# Altium PCB PCB1.PcbDoc
Units mil, origin at the board's own origin, x right, y up, seen from the top; angles counter-clockwise.
Board outline 11805 x 4015 mil, 2 copper layers (Top Layer, Bottom Layer); 46 components, 45 nets, 162 pads, 5 vias.
Unrouted connection lines stored in the file: 1.
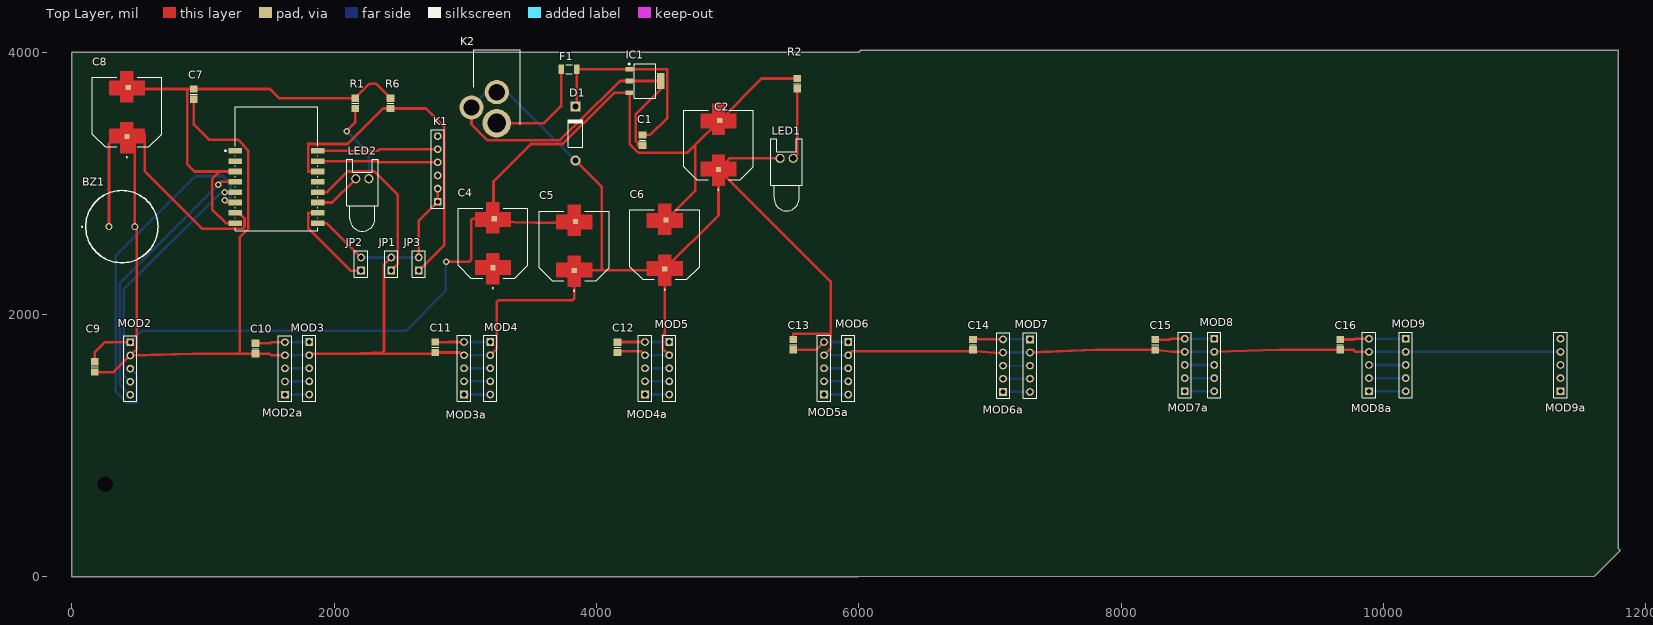
[diagram p0: Top Layer view]
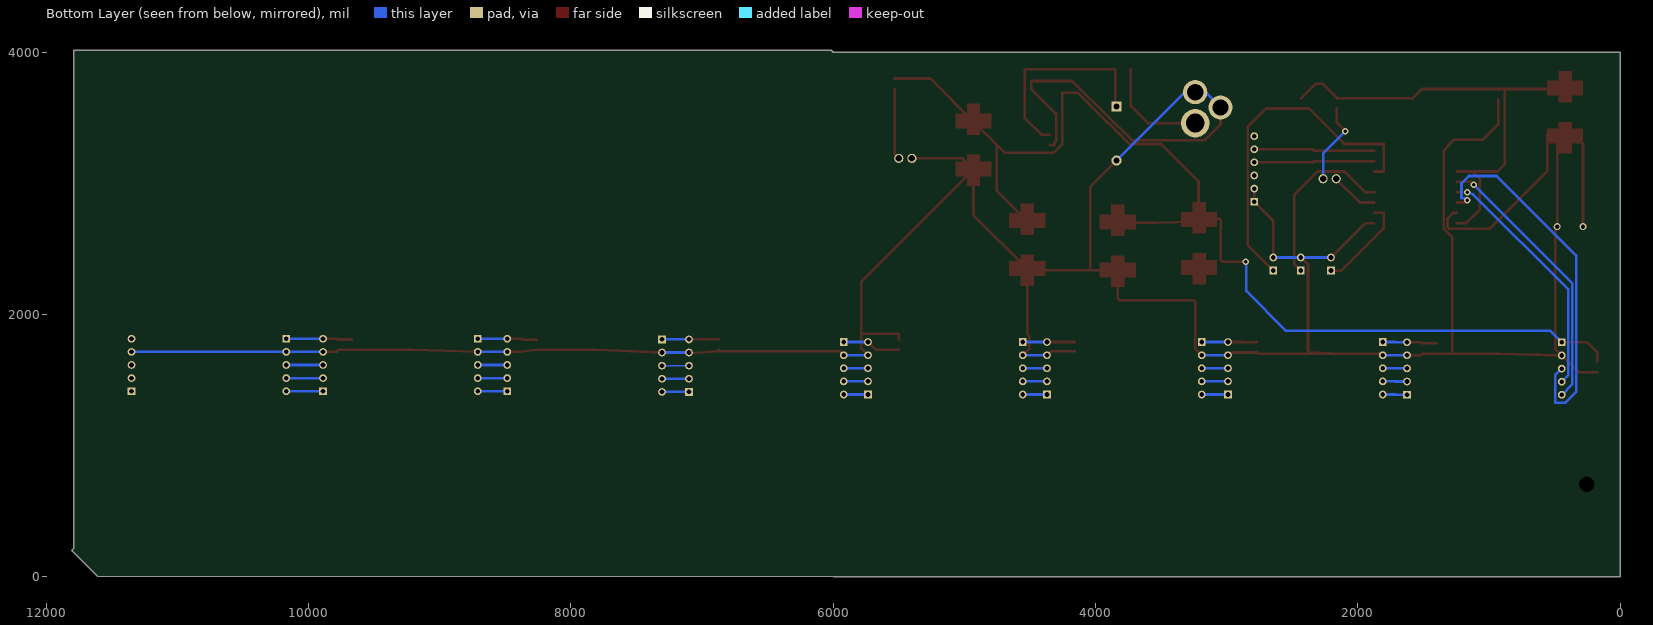
[diagram p1: Bottom Layer view, seen from below]

## Layer stack, top to bottom
Top Solder: solder mask 0.4, Solder Resist, Dk 3.5
Top Layer: signal copper 1.4
Dielectric 1: dielectric 12.6, FR-4, Dk 4.8
Bottom Layer: signal copper 1.4
Bottom Solder: solder mask 0.4, Solder Resist, Dk 3.5

## Board outline
6000,4000 6015,4015 11790,4015 11790,215 11805,200 11610,5 5995,0 0,0 0,4000

## Design rules (kind name [scope] priority, off if disabled: settings)
Clearance [All] p1: gap=10 ignorepadtopadclearanceinfootprint=FALSE except(0: Arc-Hole Track-Hole SMDPad-Hole THPad-Hole Via-Hole Fill-Hole Poly-Hole Region-Hole Text-Hole)
PolygonConnect [All] p1: connectstyle=Relief reliefconductorwidth=10 reliefentries=4 polygonreliefangle="90 Angle" airgapwidth=10
RoomDefinition Voeding [InComponentClass('Voeding')] p1: confinementstyle=ConfineIn formatcopy=TRUE lockcomponents=FALSE outline -1000,-1000 1000,-1000 1000,0 -1000,0
RoomDefinition Project [InComponentClass('Project')] p2: confinementstyle=ConfineIn formatcopy=TRUE lockcomponents=FALSE outline -1000,-1000 1000,-1000 1000,0 -1000,0
RoutingVias [All] p1: holewidth=28 width=50 viastyle="Through Hole" minholewidth=28 minwidth=50 maxholewidth=28 maxwidth=50
SolderMaskExpansion [All] p1: expansion=4 istentingtop=FALSE
Width [All] p1: maxlimit=20 minlimit=20 preferedwidth=20 minimp=50.000000 maximp=50.000000 favimp=50.000000
30 further rules are at their usual default settings.

## Classes and differential pairs
component class Voeding: C1 C2 D1 F1 IC1 K2 LED1 R2
component class Project: BZ1 C4 C5 C6 C7 C8 C9 C10 C11 C12 C13 C14 C15 C16 JP1 JP2 JP3 K1 LED2 MOD2 MOD2a MOD3 MOD3a MOD4 MOD4a MOD5 MOD5a MOD6 MOD6a MOD7 MOD7a MOD8 MOD8a MOD9 MOD9a R1 R6

## Components (designator, comment, footprint, x,y, rotation, side; value= is the part's Value field where it differs from the comment)
BZ1 "PS1420P02CT" PS1440P02BT 381.57,2670 r0 top
C1 "Cap" 6-0805_M 4350,3330 r90 top value=100nF
C2 "Cap" CAP_EEV-FK1K101V 4930.16,3292.99 r90 top value=10uF
C4 "Cap" CAP_EEV-FK1K101V 3210.16,2542.99 r90 top value=100uF
C5 "Cap" CAP_EEV-FK1K101V 3830.16,2522.99 r90 top value=100uF
C6 "Cap" CAP_EEV-FK1K101V 4520.16,2532.99 r90 top value=100uF
C7 "Cap" 6-0805_M 930,3680 r90 top value=100nF
C8 "" CAP_EEV-FK1K101V 420.16,3542.99 r90 top value=100uF
C9 "Cap" 6-0805_M 175,1600 r90 top value=100nF
C10 "Cap" 6-0805_M 1400,1740.63 r90 top value=100nF
C11 "Cap" 6-0805_M 2770,1750 r90 top value=100nF
C12 "Cap" 6-0805_M 4160,1749.37 r90 top value=100nF
C13 "Cap" 6-0805_M 5500,1770 r90 top value=100nF
C14 "Cap" 6-0805_M 6870,1770.63 r90 top value=100nF
C15 "Cap" 6-0805_M 8260,1769.37 r90 top value=100nF
C16 "Cap" 6-0805_M 9670,1770 r90 top value=100nF
D1 "Diode 1N4004" DO-41 3840,3380 r90 top
F1 "Fuse 1" CAPC3216X94N 3790,3870 r0 top
IC1 "LM3940IMP-3.3" DCY0004A_L 4370,3780 r0 top
JP1 "Header 2" HDR1X2 2435,2335 r90 top
JP2 "Header 2" HDR1X2 2205,2335 r90 top
JP3 "Header 2" HDR1X2 2645,2335 r90 top
K1 "Header 6" HDR1X6 2790,2860 r90 top
K2 "MJ-180PH" MJ-180PH 3240,3446.97 r90 top
LED1 "LED0" LED-0 5450,3190 r0 top
LED2 "LED0" LED-0 2215,3035 r0 top
MOD2 "Header 5" HDR1X5#1 445,1787.5 r270 top
MOD2a "Header 5" HDR1X5#1 1625,1389 r90 top
MOD3 "Header 5" HDR1X5#1 1810,1790 r270 top
MOD3a "Header 5" HDR1X5#1 2990,1390 r90 top
MOD4 "Header 5" HDR1X5#1 3190,1790 r270 top
MOD4a "Header 5" HDR1X5#1 4370,1390 r90 top
MOD5 "Header 5" HDR1X5#1 4555,1790 r270 top
MOD5a "Header 5" HDR1X5#1 5735,1390 r90 top
MOD6 "Header 5" HDR1X5#1 5920,1790 r270 top
MOD6a "Header 5" HDR1X5#1 7100,1410 r90 top
MOD7 "Header 5" HDR1X5#2 7305,1810 r270 top
MOD7a "Header 5" HDR1X5#1 8485,1415 r90 top
MOD8 "Header 5" HDR1X5#1 8710,1815 r270 top
MOD8a "Header 5" HDR1X5#1 9890,1415 r90 top
MOD9 "Header 5" HDR1X5#1 10170,1815 r270 top
MOD9a "Header 5" HDR1X5#1 11350,1415 r90 top
R1 "Res1" 6-0805_M 2160,3610 r90 top value=220
R2 "Res1" 6-0805_M 5530,3760 r90 top value=330
R6 "Res1" 6-0805_M 2430,3610 r90 top value=10K
? "ESP-12S" Adafruit_Industries_ESP-12S_MFG 1560,3110 r0 top

## Footprints (in the part's own frame and the unit in brackets; to place one, negate y for a bottom-side part, rotate by r counter-clockwise, add the part's x,y. Pads: shape width x height; smd on the part's side, far side on the other; paste and mask are expansions set on the pad)
6-0805_M [mm] "Chip Resistor, Body 2.0x1.2mm, IPC Low Density"
  rect 1.4x1.5 smd: 1(-1,0) 2(1,0)
  silkscreen extent 0,-0.65 0,0.65, body extent -1.07,-0.7 1.07,0.7, height 0.7
Adafruit_Industries_ESP-12S_MFG [mm]
  rect 2.6x1.1 smd paste+0 mask+0: 1(-8,3.5) 2(-8,1.5) 3(-8,-0.5) 4(-8,-2.5) 5(-8,-4.5) 6(-8,-6.5) 7(-8,-8.5) 8(-8,-10.5) 9(8,-10.5) 10(8,-8.5) 11(8,-6.5) 12(8,-4.5) 13(8,-2.5) 14(8,-0.5) 15(8,1.5) 16(8,3.5)
  silkscreen extent -10,-12 8,12, body extent -8,-12 8,12, height 3.2
CAP_EEV-FK1K101V [mm]
  rect 1x1 smd paste-1 mask+0: 1(-4.75,0) 2(4.75,-0.25)
  Top Layer region: -3.25,1.25 -1.95,1.25 -1.95,-1.25 -3.25,-1.25 -3.25,-3.45 -6.05,-3.45 -6.05,-1.25 -7.95,-1.25 -7.95,1.25 -6.05,1.25 -6.05,3.45 -3.25,3.45
  Top Layer region: 6.05,1.25 7.95,1.25 7.95,-1.25 6.05,-1.25 6.05,-3.45 3.25,-3.45 3.25,-1.25 1.95,-1.25 1.95,1.25 3.25,1.25 3.25,3.45 6.05,3.45
  silkscreen extent -8.8,-6.75 6.75,6.75
CAPC3216X94N [mil]
  rect 44x71 smd: 1(-59,0) 2(59,0)
  silkscreen extent -24,-35 24,35
DCY0004A_L [mm] "SOT223, 4-Leads, Body 6.7x3.7mm, Pitch 2.3mm, IPC High Density"
  rrect11% 1.45x0.9 smd: 1(-3.075,2.3) 2(-3.075,0) 3(-3.075,-2.3)
  rrect7% 1.45x3.15 smd: 4(3.075,0)
  silkscreen extent -3.2,-3.35 2.05,3.42, body extent -3.5,-3.25 3.5,3.25, height 1.62
DO-41 [mm] "Diode, Axial; Body 5.2 x 2.7 mm (LxDia. max), Lead Dia. 0.86 mm (max)"
  round 2 hole 1.2: 1(-5.23,0)
  rect 2x2 hole 1.2: 2(5.23,0)
  silkscreen extent -2.65,-1.4 2.75,1.4
HDR1X2 [mm] "Connector; Header; 2 Position"
  rect 1.5x1.5 hole 0.9: 1(0,0)
  round 1.5 hole 0.9: 2(2.54,0)
  silkscreen extent -1.27,-1.27 3.81,1.27
HDR1X5#1 [mm] "Connector; Header; 5 Position"
  rect 1.5x1.5 hole 0.9: 1(0,0)
  round 1.5 hole 0.9: 2(2.54,0) 3(5.08,0) 4(7.62,0) 5(10.16,0)
  silkscreen extent -1.27,-1.27 11.43,1.27
HDR1X5#2 [mm] "Connector; Header; 5 Position"
  rect 1.5x1.5 hole 0.9: 1(0,0)
  round 1.5 hole 0.9: 2(2.54,0) 4(7.62,0) 5(10.16,0) ""(5.08,0)
  silkscreen extent -1.27,-1.27 11.43,1.27
HDR1X6 [mm] "Connector; Header; 6 Position"
  rect 1.5x1.5 hole 0.9: 1(0,0)
  round 1.5 hole 0.9: 2(2.54,0) 3(5.08,0) 4(7.62,0) 5(10.16,0) 6(12.7,0)
  silkscreen extent -1.27,-1.27 13.97,1.27
LED-0 [mil] "LED; 2 Leads"
  round 70 hole 50: 1(50,0) 2(-50,0)
  silkscreen extent -120,-400 120,150
MJ-180PH [mm]
  round 5.5 hole 3.65: 1(0.3,0)
  round 4.67 hole 3.16: 2(6.3,0) 3(3.35,4.9)
  silkscreen extent 0,-4.5 14.5,4.5
PS1440P02BT [mm]
  round 1.35 hole 0.85: 1(-2.5,0) 2(2.5,0)
  silkscreen extent -7.77,-7 7,7

## Part data
BZ1: "Loudspeaker or Buzzer", Manufacturer_Name=TDK, Mouser Part Number=810-PS1420P02CT, Arrow Part Number=PS1420P02CT, Arrow Price/Stock=https://www.arrow.com/en/products/ps1420p02ct/tdk, Datasheet Link=https://product.tdk.com/info/en/catalog/datasheets/piezoelectronic_buzzer_ps_en.pdf, Manufacturer_Part_Number=PS1420P02CT, Mouser Price/Stock=https://www.mouser.co.uk/ProductDetail/TDK/PS1420P02CT/?qs=%2FYUS%2FYztVmCoyuykscZK%252Bw%3D%3D
C1 C2 C4 C5 C6 C7 C9 C10 C11 C12 C13 C14 C15 C16: "Capacitor", LatestRevisionDate=17-Jul-2002, LatestRevisionNote="Re-released for DXP Platform.", PackageDescription="Radial Cap, Thru-Hole; 2 Leads; 0.3 in Pin Spacing", PackageReference=RAD-0.3, Published=8-Jun-2000, Publisher="Altium Limited"
C8: library part Cap, "Capacitor", LatestRevisionDate=17-Jul-2002, LatestRevisionNote="Re-released for DXP Platform.", PackageDescription="Radial Cap, Thru-Hole; 2 Leads; 0.3 in Pin Spacing", PackageReference=RAD-0.3, Published=8-Jun-2000, Publisher="Altium Limited"
D1: "1 Amp General Purpose Rectifier", Code_JEDEC=DO-204-AL, ComponentLink1Description="Manufacturer Link", ComponentLink1URL=http://www.fairchildsemi.com/, ComponentLink2Description=Datasheet, ComponentLink2URL=http://www.fairchildsemi.com/ds/1N%2F1N4001.pdf, DatasheetVersion=1998, LatestRevisionDate=17-Jul-2002, LatestRevisionNote="Re-released for DXP Platform.", PackageDescription="Diode, Axial; Body 5.2 x 2.7 mm (LxDia. max), Lead Dia. 0.86 mm (max)", PackageReference=DO-41, PackageVersion=Aug-1999, Published=8-Jun-2000, Publisher="Altium Limited"
F1: "Fuse", LatestRevisionDate=17-Jul-2002, LatestRevisionNote="Re-released for DXP Platform.", PackageDescription="Thru-Hole; 2 Leads", PackageReference=PIN-W2/E2.8, Published=8-Jun-2000, Publisher="Altium Limited"
IC1: library part CMP-0062-01793-3, "1A Low Dropout Regulator for 5V to 3.3V Conversion, 4-pin SOT-223", Manufacturer="Texas Instruments", PackageTopMarking=XYTT*L52B, PowerWise=N, Code_IPC=SOT223-4, Code_JEDEC=TO-261-AA, ComponentLink1Description="Datasheet URL", ComponentLink1URL=http://www.ti.com/general/docs/lit/getliterature.tsp?genericPartNumber=LM3940&fileType=pdf, CompType="LDO IC", PackageDescription="Molded SOT-223, 6.50 x 3.56 x 1.6mm Body, 4 Lead, 2.3mm Pitch", PackageReference=DCY0004A, PinCount=4, RoHS=N
JP1 JP2 JP3: "Header, 2-Pin", LatestRevisionDate=17-Jul-2002, LatestRevisionNote="Re-released for DXP Platform.", Publisher="Altium Limited"
K1: "Header, 6-Pin", LatestRevisionDate=17-Jul-2002, LatestRevisionNote="Re-released for DXP Platform.", Publisher="Altium Limited"
K2: "Connector", Manufacturer_Name=MULTICOMP, Datasheet Link=http://www.farnell.com/datasheets/1910033.pdf, Manufacturer_Part_Number=MJ-180PH
LED1 LED2: "Typical INFRARED GaAs LED", LatestRevisionDate=08-Jul-2005, LatestRevisionNote="Mech Layer 1 removed.", PackageDescription="LED; 2 Leads", PackageReference=LED-0, Published=8-Jun-2000, Publisher="Altium Limited"
MOD2 MOD2a MOD3 MOD3a MOD4 MOD4a MOD5 MOD5a MOD6 MOD6a MOD7 MOD7a MOD8 MOD8a MOD9 MOD9a: "Header, 5-Pin", LatestRevisionDate=17-Jul-2002, LatestRevisionNote="Re-released for DXP Platform.", Publisher="Altium Limited"
R1 R2 R6: "Resistor", LatestRevisionDate=17-Jul-2002, LatestRevisionNote="Re-released for DXP Platform.", PackageDescription="Axial Device, Thru-Hole; 2 Leads; 0.3 in Pin Spacing", PackageReference=AXIAL-0.3, Published=8-Jun-2000, Publisher="Altium Limited"

## Free pads (board coordinates)
  round 60 hole 118.11: 1(255,705)

## Via types
v1: diameter 50, hole 28, Top Layer to Bottom Layer, 5 vias

## Nets (pads, with @x,y where several pads share a name; then routed paths per layer and width w, separated by ;. In a path a pad name is that pad's centre, name@x,y a point inside that pad or via, vN(x,y) a via of type N, cw(c..) or ccw(c..) an arc to the next point about the centre after c; other vN are vias at no path point)
+5: C2.2 C4.2 C5.2 C6.2 C9.2 IC1.3 MOD2.1 R2.2 | length 8668.2
  Top Layer w20: C9.2 175,1712.5 250,1787.5 MOD2.1 ; v1(2855.16,2402.99) 3033.36,2402.99 3045.07,2414.71 3045.07,2434.62 3045.16,2434.71 3045.16,2720.83 3054.33,2730 C4.2 ; C5.2@3840,2700 3535.01,2700 3214.84,2707.01 3214.84,2730 3214.84,3014.84 3500,3300 3742.43,3300 3908.96,3466.54 3912.51,3466.54 4135.42,3689.45 IC1.3 4253,3689.45 4253,3300 4321,3232 4692,3232 4753,3293 ; C6.2 4753,2943 4753,3293 ; R2.2 5259.37,3799.37 C2.2 4753,3293
  Bottom Layer w20: MOD2.1 532.5,1875 2547,1875 2850,2178 v1@2850,2380
GND: ?.9 BZ1.2 C1.1 C2.1 C4.1 C5.1 C6.1 C7.1 C8.1 C9.1 C10.1 C11.1 C12.1 C13.2 C14.1 C15.1 C16.1 D1.1 IC1.2 IC1.4 JP1.2 JP2.2 JP3.2 K1.1 K1.2 K2.2 K2.3 LED1.2 MOD2.2 MOD2a.4 MOD3.2 MOD3a.4 MOD4.2 MOD4a.4 MOD5.2 MOD5a.4 MOD6.2 MOD6a.4 MOD7.2 MOD7a.4 MOD8.2 MOD8a.4 MOD9.2 MOD9a.4 | length 26169.2
  Top Layer w20: C9.1 318.13,1560.63 MOD2.2 ; C8.1 480,3296.14 BZ1.2 495,2670 495,1737.5 MOD2.2 ; C7.1 930,3447 1044,3333 1268.28,3333 1307.25,3294.03 1307.25,3286.7 1346.22,3247.73 1346.22,2654.25 1280,2588.03 1280,1701.26 ; MOD2a.4 1518.26,1689 1506,1701.26 C10.1 1280,1701.26 ; MOD3.2 1820,1700 1822.53,1697.47 1838.72,1697.47 1841.24,1700 2122.67,1700 ; ?.9 1943.39,2696.61 JP2.2 ; JP1.2 2380,2380 2380,1721.51 2368.62,1710.13 2122.67,1700 ; JP3.2 2645,2715 K1.1 K1.2 ; C11.1@2768.03,1710.63 2757.4,1700 2122.67,1700 ; C11.1 2770.63,1710 2959.43,1710 2979.43,1690 MOD3a.4 ; K2.3 3047.09,3449.91 3167,3330 3721.72,3330 4119.45,3719.45 4180,3780 IC1.2 IC1.4 4491.06,3721 4300,3529.94 4300,3322 4316,3306 4316,3290.63 C1.1 ; MOD4.2 3240,1740 3240,2098.28 3251.72,2110 3818.44,2110 3830.16,2121.72 C5.1 4039.49,2335.98 4040,2336.5 ; D1.1 4040,2974.09 4040,2336.5 ; C12.1@4160,1720.63 4339.37,1720.63 MOD4a.4 ; MOD5.2 4505,1740 4505,1838 4520.16,1853.16 4520.16,2336.5 C6.1 ; LED1.2 5014.17,3190 C2.1 ; C13.2 5500,1852 5783,1852 5785,1850 ; MOD5a.4 5785,1740 5785,1850 ; MOD6.2 5950,1720 C14.1@6870,1720 ; C14.1 6878.47,1721.32 6889.53,1720.42 6889.7,1720.42 7085.67,1704.75 7093.83,1704.75 7099.44,1709.52 MOD6a.4 ; MOD7.2 7803,1730 C15.1 8387,1715 MOD7a.4 ; MOD8.2 9205.63,1730.63 C16.1 9772,1730.63 9787.63,1715 MOD8a.4 ; MOD2.2 928.76,1701.26 1280,1701.26 ; 4040,2336.5 4510.67,2336.5 C6.1 ; C6.1 4930.16,2755.98 C2.1 ; C2.1 5785,2251.14 5785,1850
  Bottom Layer w20: MOD2a.4 1717,1689 1718,1690 MOD3.2 ; JP2.2 JP1.2 JP3.2 ; MOD3a.4 MOD4.2 ; K2.3 3163.23,3695 K2.2 3319.09,3695 D1.1 ; MOD4a.4 MOD5.2 ; MOD5a.4 MOD6.2 ; MOD6a.4 MOD7.2 ; MOD7a.4 MOD8.2 ; MOD8a.4 MOD9.2 MOD9a.4
Net_4: ?.4 MOD2.5 | length 2084.3
  Top Layer w20: v1(1115,2989) 1137.57,3011.57 ?.4
  Bottom Layer w20: MOD2.5 365.47,1467.03 365.47,2239.47 v1(1115,2989)
Net_5: ?.5 MOD2.4 | length 1877
  Top Layer w20: v1(1165,2932.83) ?.5
  Bottom Layer w20: MOD2.4 395.47,1537.03 395.47,2191.04 1120.86,2916.42 v1(1165,2932.83)
Net_6: ?.6 MOD2.3 | length 2914.5
  Top Layer w20: v1(1165,2872) 1182.91,2854.09 ?.6
  Bottom Layer w20: MOD2.3 495,1537.5 495,1328 418,1328 335,1411 335,2450 941,3056 1154,3056 1210,3000 1210,2887 1180,2887 v1(1165,2872)
Net_7: ?.7 BZ1.1 | length 2335.4
  Top Layer w20: BZ1.1 283.15,3304.15 375,3396 530,3396 555,3371 555,3093 993.04,2654.96 1304.5,2654.96 1316.22,2666.68 1316.22,2733.7 1274.57,2775.35 ?.7
Net_10: ?.10 JP2.1 | length 726.9
  Top Layer w20: ?.10 1803,2775.35 1803,2655 2123,2335 JP2.1
Net_11: ?.11 LED2.2 | length 365
  Top Layer w20: ?.11 1984.09,2854.09 LED2.2
Net_12: ?.12 JP1.1 | length 1346.6
  Top Layer w20: ?.12 1946,2932.83 2103.17,3090 2307,3090 2485,2912 2485,2385 JP1.1
Net_14: ?.14 JP3.1 R6.1 | length 2665.1
  Top Layer w20: ?.14 1803,3090.32 1803,3300 2103.43,3300 2374.06,3570.63 R6.1 2700,3570.63 2840,3430.63 2840,2530 JP3.1
Net_15: ?.15 K1.4 | length 918.8
  Top Layer w20: ?.15 2333,3169.06 2342.06,3160 K1.4
Net_16: ?.16 K1.5 | length 920.1
  Top Layer w20: ?.16 2333,3247.8 2345.2,3260 K1.5
NetC1_2: C1.2 D1.2 F1.2 IC1.1 | length 1591.3
  Top Layer w20: D1.2 3849,3615.28 F1.2 4048,3870 4048.55,3870.55 IC1.1 4540,3870.55 4540,3500 4409.37,3369.37 C1.2
NetC10_2: C10.2 MOD2a.5 MOD3.1 | length 414.1
  Top Layer w20: C10.2 1512,1780 1521,1789 MOD2a.5
  Bottom Layer w20: MOD2a.5 1717,1789 1718,1790 MOD3.1
NetC11_2: C11.2 MOD3a.5 MOD4.1 | length 420.3
  Top Layer w20: C11.2 2879,1789.37 2879.63,1790 MOD3a.5
  Bottom Layer w20: MOD3a.5 MOD4.1
NetC12_2: C12.2 MOD4a.5 MOD5.1 | length 395.5
  Top Layer w20: C12.2 4161.26,1790 MOD4a.5
  Bottom Layer w20: MOD4a.5 MOD5.1
NetC13_1: C13.1 MOD5a.5 MOD6.1 | length 444.6
  Top Layer w20: C13.1 5675.63,1730.63 MOD5a.5
  Bottom Layer w20: MOD5a.5 MOD6.1
NetC14_2: C14.2 MOD6a.5 MOD7.1 | length 435
  Top Layer w20: C14.2 MOD6a.5
  Bottom Layer w20: MOD6a.5 MOD7.1
NetC15_2: C15.2 MOD7a.5 MOD8.1 | length 452.6
  Top Layer w20: C15.2 8369,1808.74 8375.26,1815 MOD7a.5
  Bottom Layer w20: MOD7a.5 MOD8.1
NetC16_2: C16.2 MOD8a.5 MOD9.1 | length 502.3
  Top Layer w20: C16.2 9777,1809.37 9782.63,1815 MOD8a.5
  Bottom Layer w20: MOD8a.5 MOD9.1
NetF1_1: F1.1 K2.1 | length 825.5
  Top Layer w20: K2.1 3600,3458.78 3731,3589.78 F1.1
NetLED1_1: LED1.1 R2.1 | length 543.1
  Top Layer w20: LED1.1 5530,3220 R2.1
NetLED2_1: LED2.1 R1.1 | length 633
  Top Layer w20: v1(2095,3398) 2160,3463 R1.1
  Bottom Layer w20: v1(2095,3398) 2265,3228 LED2.1
NetMOD2a_1: MOD2a.1 MOD3.5 | length 185.4
  Bottom Layer w20: MOD2a.1 1717,1389 1718,1390 MOD3.5
NetMOD2a_2: MOD2a.2 MOD3.4 | length 185.4
  Bottom Layer w20: MOD2a.2 1717,1489 1718,1490 MOD3.4
NetMOD2a_3: MOD2a.3 MOD3.3 | length 185.4
  Bottom Layer w20: MOD2a.3 1717,1589 1718,1590 MOD3.3
NetMOD3a_1: MOD3a.1 MOD4.5 | length 200
  Bottom Layer w20: MOD3a.1 MOD4.5
NetMOD3a_2: MOD3a.2 MOD4.4 | length 200
  Bottom Layer w20: MOD3a.2 MOD4.4
NetMOD3a_3: MOD3a.3 MOD4.3 | length 200
  Bottom Layer w20: MOD3a.3 MOD4.3
NetMOD4a_1: MOD4a.1 MOD5.5 | length 185
  Bottom Layer w20: MOD4a.1 MOD5.5
NetMOD4a_2: MOD4a.2 MOD5.4 | length 185
  Bottom Layer w20: MOD4a.2 MOD5.4
NetMOD4a_3: MOD4a.3 MOD5.3 | length 185
  Bottom Layer w20: MOD4a.3 MOD5.3
NetMOD5a_1: MOD5a.1 MOD6.5 | length 185
  Bottom Layer w20: MOD5a.1 MOD6.5
NetMOD5a_2: MOD5a.2 MOD6.4 | length 185
  Bottom Layer w20: MOD5a.2 MOD6.4
NetMOD5a_3: MOD5a.3 MOD6.3 | length 185
  Bottom Layer w20: MOD5a.3 MOD6.3
NetMOD6a_1: MOD6a.1 MOD7.5 | length 205
  Bottom Layer w20: MOD6a.1 MOD7.5
NetMOD6a_2: MOD6a.2 MOD7.4 | length 205
  Bottom Layer w20: MOD6a.2 MOD7.4
NetMOD6a_3: MOD6a.3
NetMOD7a_1: MOD7a.1 MOD8.5 | length 225
  Bottom Layer w20: MOD7a.1 MOD8.5
NetMOD7a_2: MOD7a.2 MOD8.4 | length 225
  Bottom Layer w20: MOD7a.2 MOD8.4
NetMOD7a_3: MOD7a.3 MOD8.3 | length 225
  Bottom Layer w20: MOD7a.3 MOD8.3
NetMOD8a_1: MOD8a.1 MOD9.5 | length 280
  Bottom Layer w20: MOD8a.1 MOD9.5
NetMOD8a_2: MOD8a.2 MOD9.4 | length 280
  Bottom Layer w20: MOD8a.2 MOD9.4
NetMOD8a_3: MOD8a.3 MOD9.3 | length 280
  Bottom Layer w20: MOD8a.3 MOD9.3
VCC: ?.3 ?.8 C7.2 C8.2 R1.2 R6.2 | length 3618.7
  Top Layer w20: C8.2 439.69,3720.31 439.73,3719.92 440.28,3719.37 880,3719.37 ; ?.8 1174.24,2696.61 1070,2800.86 1070,3034 1126.32,3090.32 ; ?.3 1126.32,3090.32 ; R6.2 2319.37,3760 2270.63,3760 R1.2 1580,3649.37 1510,3719.37 C7.2 880,3719.37 ; 880,3719.37 880,3144.32 934,3090.32 1126.32,3090.32
pads on no net: ?.1 ?.2 ?.13 K1.3 K1.6 MOD7. MOD9a.1 MOD9a.2 MOD9a.3 MOD9a.5
copper on no net: | length 205
  Bottom Layer w10: 7100,1610 7305,1610

## Dimensions
7305,1410 to 8485,1415 on Top Layer
10170,1415 to 11350,1415 on Top Layer
8710,1415 to 9890,1415 on Top Layer
445,1387.5 to 1625,1389 on Top Layer
1810,1390 to 2990,1390 on Top Layer
3190,1390 to 4370,1390 on Top Layer
4555,1390 to 5735,1390 on Top Layer
5920,1390 to 7100,1410 on Top Layer